# Altium PCB PanelMT.PcbDoc
Units mm, origin at the board's own origin, x right, y up, seen from the top; angles counter-clockwise.
Board outline 152.4 x 101.6 mm, 2 copper layers (Top Layer, Bottom Layer); 25 components, 16 nets, 75 pads, 0 vias.
Unrouted connection lines stored in the file: 8.
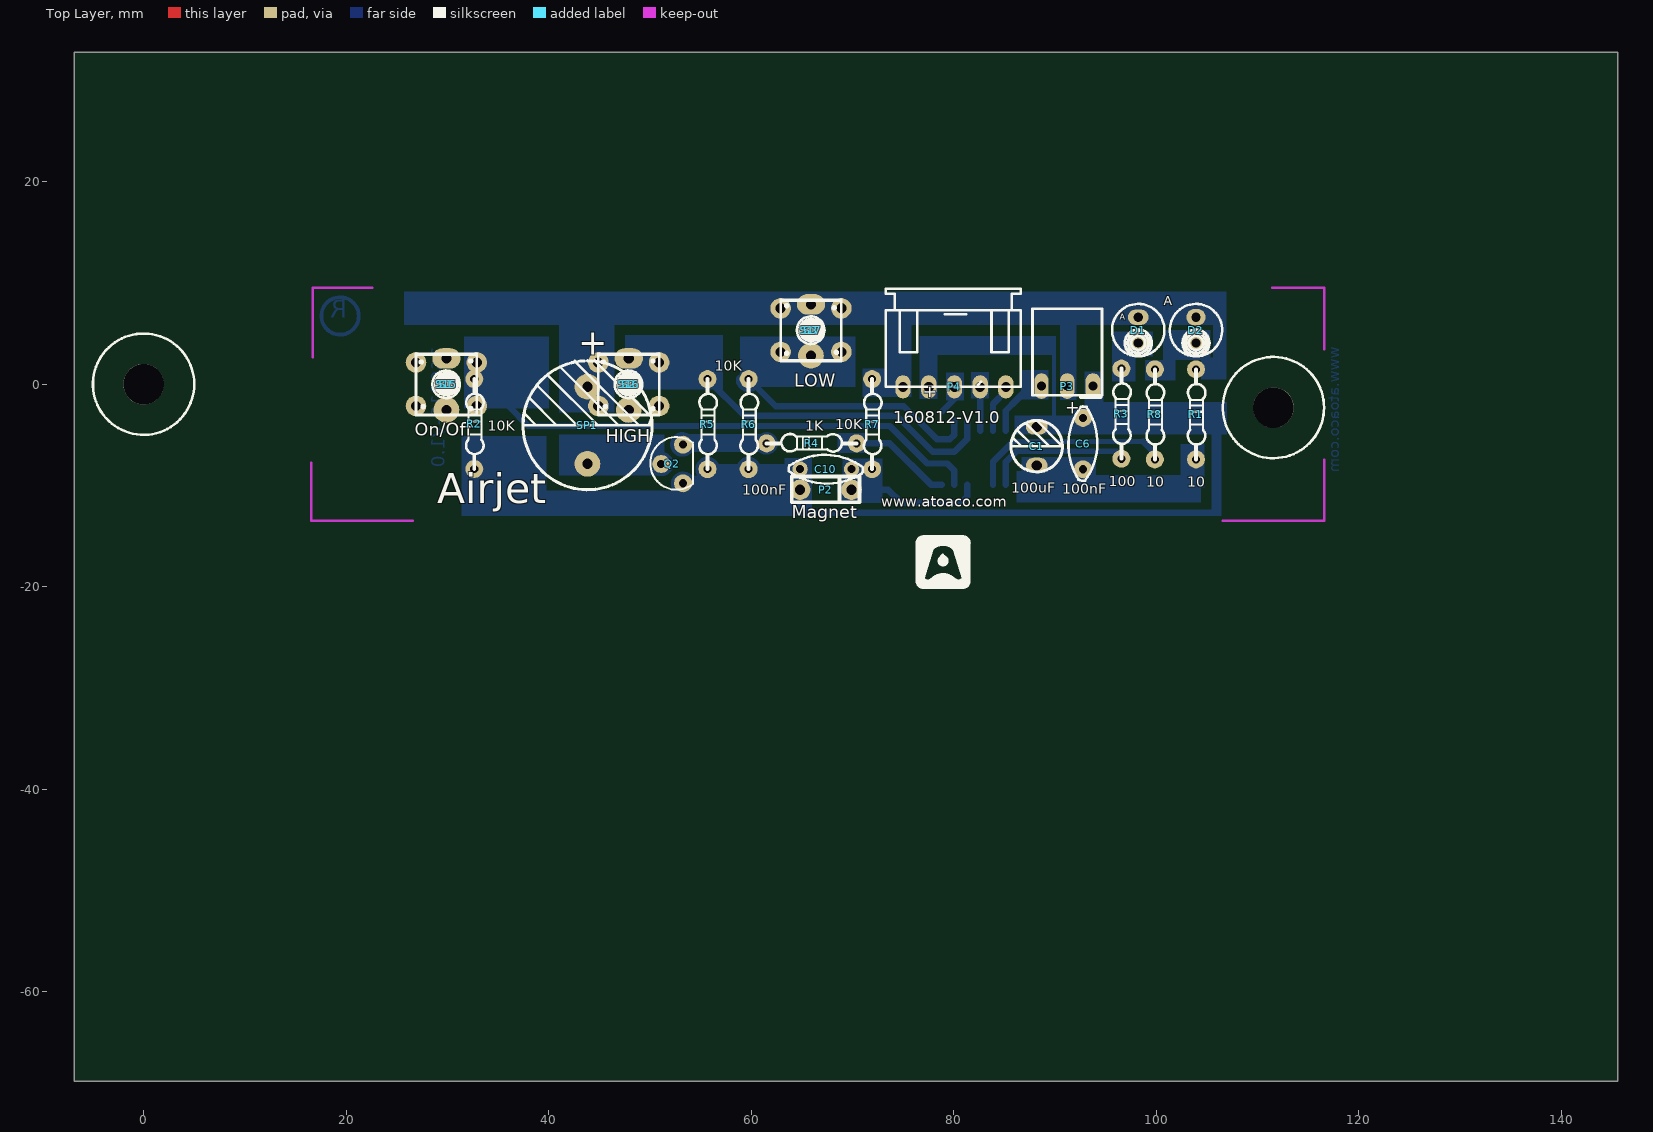
[diagram p0: Top Layer view]
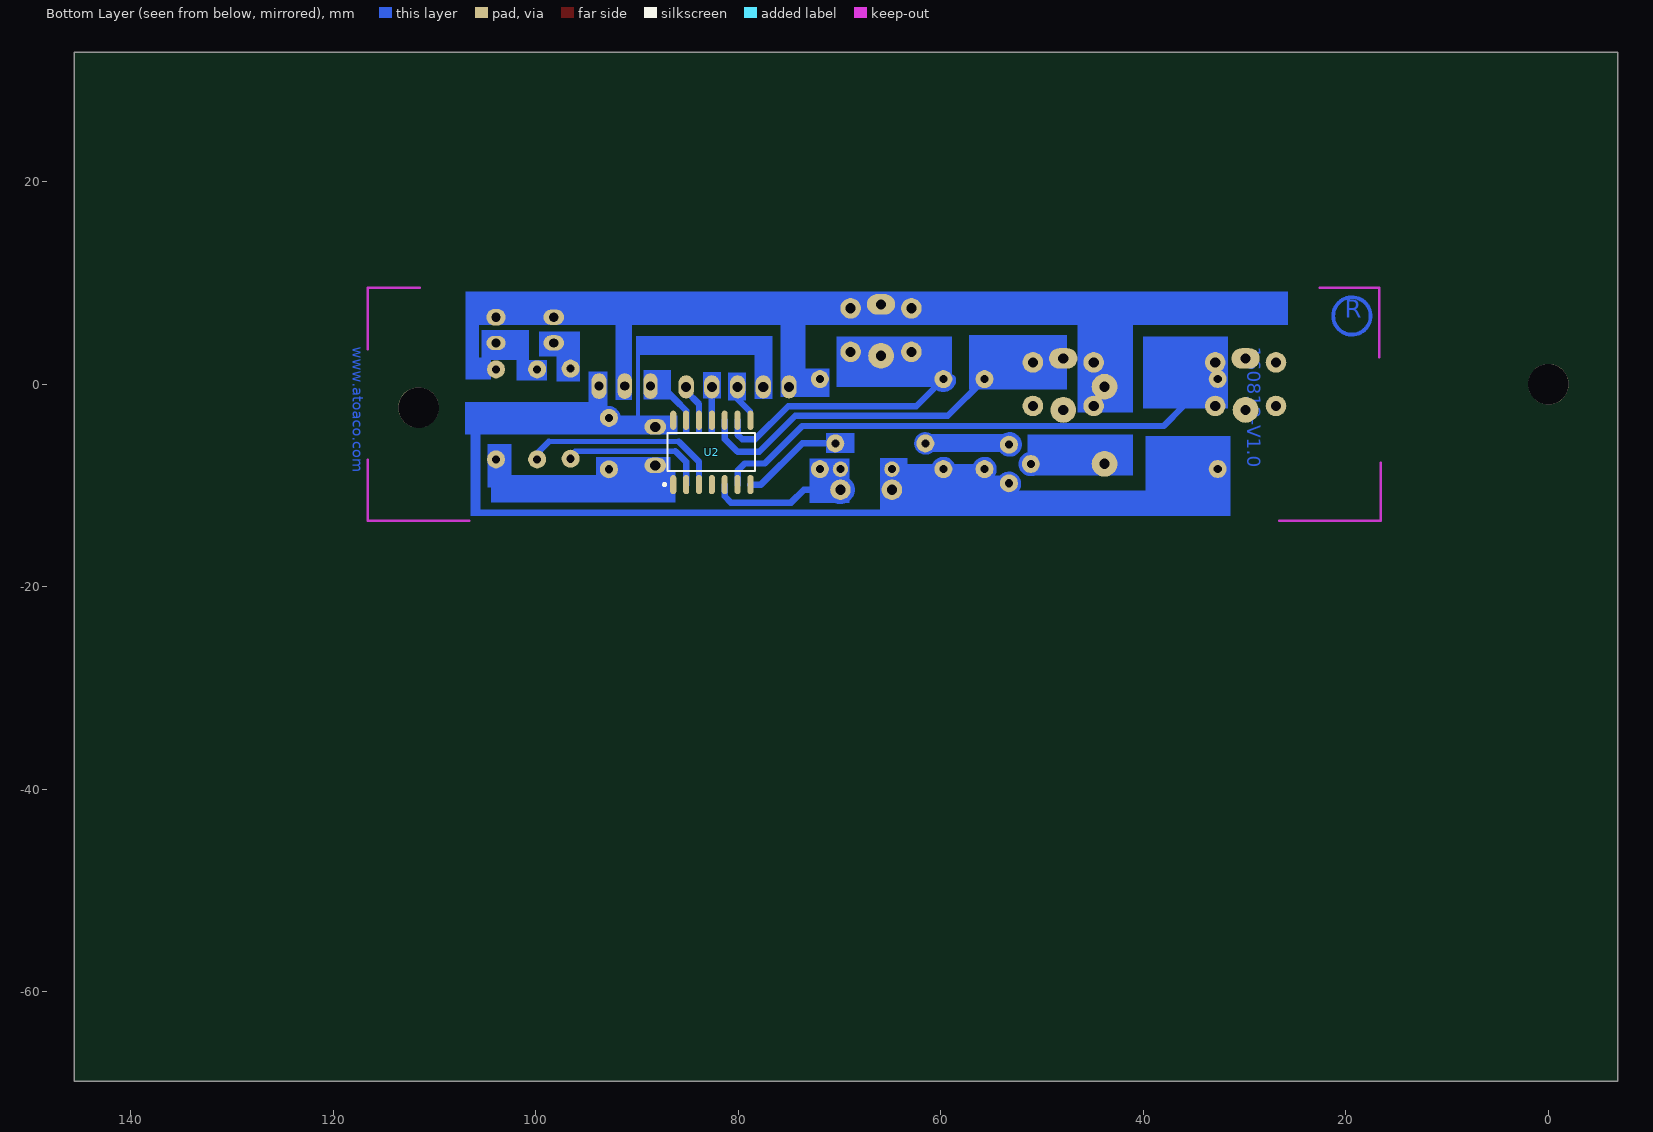
[diagram p1: Bottom Layer view, seen from below]

## Layer stack, top to bottom
Top Layer: signal copper 0.0356
Dielectric: dielectric 0.32, FR-4, Dk 4.8
Bottom Layer: signal copper 0.0356

## Board outline
-6.842,-68.829 145.558,-68.829 145.558,32.771 -6.842,32.771

## Design rules (kind name [scope] priority, off if disabled: settings)
Clearance [All] p1: gap=0.254
PolygonConnect [All] p1: connectstyle=Relief reliefconductorwidth=0.254 reliefentries=4 polygonreliefangle="90 Angle"
RoutingVias [All] p1: holewidth=0.711 width=1.27 viastyle="Through Hole" minholewidth=0.711 minwidth=1.27 maxholewidth=0.711 maxwidth=1.27
SolderMaskExpansion [All] p1: expansion=0.102
TestPointUsage [All] p1: valid=0 allowmultiple=FALSE
Testpoint [All] p1: side=15 testpointundercomponent=TRUE minsize=1.016 maxsize=2.54 preferedsize=1.524 minholesize=0 maxholesize=1.016 preferedholesize=0.813 testpointgrid=0.025 style=1023 order=0-112345678
Width [All] p1: maxlimit=2.54 minlimit=0.254 preferedwidth=0.254 toplayer_prefwidth=0.635 bottomlayer_prefwidth=0.635 minimp=50.000000 maximp=50.000000 favimp=50.000000
19 further rules are at their usual default settings.

## Components (designator, comment, footprint, x,y, rotation, side; value= is the part's Value field where it differs from the comment)
C1 "100uF" RB.15/.2 88.193,-7.388 r90 top
C6 "100nF" RAD0.2#1 92.765,-3.324 r270 top
C10 "100nF" RAD0.2#2 64.825,-8.388 r0 top
D1 "RED" LED0.5#1 98.216,5.342 r270 top
D2 "Green" LED0.5#2 103.916,5.342 r270 top locked (schematic designator Dred)
P2 "Magnet" Magnet 69.905,-10.42 r180 top
P3 "IrReceiver" IrRec1 91.195,5.042 r0 top locked
P4 "Header 5" xH5RA 74.985,-0.26 r270 top
Q2 "2N3904" TO92BS2 52.633,-7.88 r270 top
R1 "10" RES0.35 103.916,-7.423 r90 top locked
R2 "10K" RES0.35 32.655,-8.374 r90 top
R3 "100" RES0.35 96.55,-7.358 r90 top
R4 "1K" RES0.35 70.413,-5.848 r180 top
R5 "10K" RES0.35 55.681,-8.388 r90 top
R6 "10K" RES0.35 59.745,-8.388 r90 top
R7 "10K" RES0.35 71.937,-8.388 r90 top
R8 "10" RES0.35 99.852,-7.423 r90 top (schematic designator R1)
S1 "On/Off" PUSHBOT2 29.9,0 r270 top locked
S2 "HIGH" PUSHBOT2 47.9,0 r270 top locked
S3 "LOW" PUSHBOT2 65.9,5.342 r270 top locked
S15 "100/2W" PUSHBOT4 29.9,0 r180 top locked
S16 "100/2W" PUSHBOT4 47.9,0 r180 top locked
S17 "100/2W" PUSHBOT4 65.9,5.342 r0 top locked
SP1 "BUZZER" RB.3/.6 43.831,-0.246 r90 top
U2 "ATtiny24A-SSU" SOIC14 86.415,-9.912 r90 bottom

## Footprints (in the part's own frame and the unit in brackets; to place one, negate y for a bottom-side part, rotate by r counter-clockwise, add the part's x,y. Pads: shape width x height; smd on the part's side, far side on the other; paste and mask are expansions set on the pad)
IrRec1 [mm] "38KHz Ir Receiver"
  oval 1.397x2.54 hole 0.9: 1(-2.531,-5.231) 2(0.009,-5.231)
  oval 1.524x2.54 hole 0.9: 3(2.549,-5.231)
  silkscreen extent -3.42,-6.32 3.44,2.39
LED0.5#1 [mil] "3 color common anode 0.5mm"
  oval 60x80 hole 35.43: 1(-50,0) 2(50,0)
  silkscreen extent -102,-102 102,102
LED0.5#2 [mil] "3 color common anode 0.5mm"
  oval 65x75 hole 35.43: 1(-50,0)
  oval 55x75 hole 35.43: 2(50,0)
  silkscreen extent -102,-102 102,102
Magnet [mil]
  round 80 hole 39.37: 1(0,0) 2(200,0)
  silkscreen extent -31,-51 232,49
PUSHBOT2 [mm] "NO-2pin"
  oval 2.032x2.794 hole 1: 1(-2.54,0)
  round 2.54 hole 1: 2(2.54,0)
  silkscreen extent -2.92,-3 3.08,3
PUSHBOT4 [mm]
  round 2.032 hole 1: 1(3,-2.15) 2(3,2.15) 3(-3,-2.15) 4(-3,2.15)
  silkscreen extent -3,-3 3,3
RAD0.2#1 [mil]
  round 70 hole 31.5: 1(0,0) 2(200,0)
  silkscreen extent -44,-57 244,55
RAD0.2#2 [mil]
  round 60 hole 31.5: 1(0,0) 2(200,0)
  silkscreen extent -44,-57 244,55
RB.3/.6 [mil]
  round 100 hole 40: 1(0,0) 2(-300,0)
  silkscreen extent -401,-251 102,251
RB.15/.2 [mil]
  oval 60x85 hole 39.37: 1(-25,0) 2(125,0)
  silkscreen extent -50,-100 150,100
RES0.35 [mil] "Diode, Axial; Body 5.2 x 2.7 mm (LxDia. max), Lead Dia. 0.86 mm (max)"
  round 70 hole 31.5: 1(0,0)
  round 70 hole 31.5 paste+0: 2(350,0)
  silkscreen extent 0,-37 350,32
SOIC14 [mm] "SOIC, 16-Leads, Body 9.9x3.9mm, Pitch 1.27mm, IPC High Density"
  oval 1.9x0.6 smd: 1(0,0) 2(0,-1.27) 3(0,-2.54) 4(0,-3.81) 5(0,-5.08) 6(0,-6.35) 7(0,-7.62) 8(6.351,-7.62) 9(6.351,-6.35) 10(6.351,-5.08) 11(6.351,-3.81) 12(6.351,-2.54) 13(6.351,-1.27) 14(6.351,0)
  silkscreen extent -0.12,-8.08 5.08,0.98, body extent 0.4,-8.08 5.97,0.51, height 1.75
TO92BS2 [mil] "NPN-CC5551,C945 Base Side"
  round 70 hole 31.5: 1(-75,25) 2(0,-60) 3(75,25)
  silkscreen extent -105,-102 100,63
xH5RA [mil] "100mil between pins"
  oval 90x60 hole 39.37: 1(0,0) 2(0,100) 3(0,200) 4(0,300) 5(0,400)
  silkscreen extent -382,-67 0,458

## Part data
C1 C10: library part Cap, "Capacitor SMD"
C6: library part "Cap Pol", "Polarized Capacitor (SMD)"
D1 D2: library part LED0.5, "LED Radial 0.5"
P2: library part "Header 6", "Header, 6-Pin"
P3: library part "Header 3", "3pin"
P4: "Header, 5-Pin"
Q2: library part BC337, "NPN General Purpose Amplifier"
R1 R2 R3 R4 R5 R6 R7 R8: library part Resistor, "Resistor"
S1 S2 S3: library part SW-PB, "Push Botton"
U2: library part ATtiny24-16PC, "8-Bit AVR Microcontroller with 2K Bytes of Flash Memory"

## Free pads (board coordinates)
  round 4 hole 4: 2(0,0) 2(111.565,-2.308)

## Nets (pads, with @x,y where several pads share a name; then routed paths per layer and width w, separated by ;. In a path a pad name is that pad's centre, name@x,y a point inside that pad or via, vN(x,y) a via of type N, cw(c..) or ccw(c..) an arc to the next point about the centre after c; other vN are vias at no path point)
+5V: D1.1 D2.1 P3.2 P4.1 R1.2 R7.2 S1.1 S2.1 S3.1 S15.1 S15.3 S16.1 S16.3 S17.2 S17.4 SP1.1
BUZZER: R4.1 U2.7 | length 10.6
  Bottom Layer w0.635: R4.1@69.905,-5.848 73.69,-5.848 77.754,-9.912 U2.7
DIMOUT: P4.3 U2.8 | length 2.5
  Bottom Layer w0.635: U2.8@78.871,-2.673 80.141,-1.403 ; P4.3@80.065,-0.972 P4.3
GND: C1.2 C6.1 C10.1 P2.2 P3.3 P4.2 Q2.3 R2.1 R5.1 R6.1 U2.14 | length 19.7
  Bottom Layer w0.635: 54.157,-9.836 ccw(c53.268,-9.836) 54.157,-9.836
  Bottom Layer w0.889: R5.1@56.447,-8.388 ccw(c55.681,-8.388) R5.1@56.447,-8.388 ; R6.1@60.511,-8.388 ccw(c59.745,-8.388) R6.1@60.511,-8.388 ; C6.1@93.479,-3.324 ccw(c92.765,-3.324) C6.1@93.479,-3.324
IRSEN: P3.1 U2.13 | length 6.5
  Bottom Layer w0.635: 85.145,-4.577 85.145,-2.619 86.252,-1.513 87.575,-0.189 P3.1
KEY1: R2.2 S1.2 S15.2 S15.4 U2.6 | length 48
  Bottom Layer w0.635: 36.047,-2.191 37.983,-4.127 73.67,-4.127 77.373,-7.83 79.354,-7.83 80.065,-8.541 U2.6
KEY2: R5.2 S2.2 S16.2 S16.4 U2.10 | length 31
  Bottom Layer w0.635: R5.2 59.313,-3.131 74.375,-3.131 77.931,-6.687 80.065,-6.687 81.335,-5.417 U2.10
KEY3: R6.2 S3.2 S17.1 S17.3 U2.9 | length 27
  Bottom Layer w0.635: R6.2 62.412,-2.165 75.061,-2.165 78.338,-5.442 79.608,-5.442 80.065,-4.985 U2.9
  Bottom Layer w0.889: R6.2@58.918,0.502 ccw(c59.745,0.502) R6.2@60.572,0.502
LED: R3.1 U2.2 | length 13.7
  Bottom Layer w0.508: 86.198,-6.624 R3.1@96.127,-6.624
  Bottom Layer w0.635: U2.2 85.145,-7.677 86.198,-6.624
MAGNET: C10.2 P2.1 R7.1 U2.5 | length 19.5
  Bottom Layer w0.635: P2.1 73.512,-10.42 74.782,-11.69 80.725,-11.69 81.335,-11.081 U2.5
  Bottom Layer w0.889: P2.1@70.879,-10.42 ccw(c69.905,-10.42) P2.1@70.879,-10.42
NetD1_2: D1.2 R3.2
NetQ2_1: Q2.1 R4.2 | length 9.8
  Bottom Layer w0.635: Q2.1@54.106,-5.95 ccw(c53.208,-5.95) Q2.1@54.106,-5.95
  Bottom Layer w0.889: R4.2@62.183,-5.848 ccw(c61.523,-5.848) R4.2@62.183,-5.848
NetQ2_2: Q2.2 SP1.2 | length 5.6
  Bottom Layer w0.635: 51.998,-7.88 ccw(c51.109,-7.88) 51.998,-7.88
RELAY1: P4.4 U2.11 | length 4.7
  Bottom Layer w0.635: P4.4@82.351,-0.514 P4.4 82.605,-4.577
VMIC: C1.1 C6.2 R1.1 U2.1
ZEROC: P4.5 U2.12 | length 4.8
  Bottom Layer w0.635: 83.875,-4.577 83.875,-1.962 85.145,-0.692 P4.5
pads on no net: D2.2 R8.1 R8.2 U2.3 U2.4
copper on no net: | length 31.8
  Bottom Layer w0.381: 21.25,6.739 ccw(c19.401,6.739) 21.25,6.739
  Bottom Layer w0.508: 85.856,-5.671 98.709,-5.671
  Bottom Layer w0.635: 83.875,-9.912 83.875,-7.652 85.856,-5.671 ; 98.709,-5.671 99.852,-6.814 99.852,-7.423

## Keep-outs
Keep-Out Layer:
  lines w0.254: 16.565,-7.753 16.565,-13.468 26.565,-13.468 ; 16.692,2.645 16.692,9.532 22.559,9.532 ; 106.565,-13.468 116.565,-13.468 116.565,-7.468 ; 111.459,9.532 116.565,9.532 116.565,3.448

## Other copper
Bottom Layer:
  rectangle net NetQ2_1: 53.522,-6.687 62.031,-4.909
  rectangle net GND: 31.41,-13.011 106.456,-12.376
  rectangle net GND: 105.44,-12.503 106.456,-3.625
  rectangle net GND: 93.361,-4.985 106.964,-1.77
  rectangle net NetQ2_2: 46.879,-9.023 51.439,-4.945
  rectangle net NetQ2_2: 41.037,-9.023 46.879,-4.945
  rectangle net GND: 53.954,-10.954 55.935,-9.023
  rectangle net GND: 31.41,-10.522 39.767,-5.112
  rectangle net GND: 31.41,-12.402 57.434,-10.522
  rectangle net GND: 55.402,-12.833 66.019,-7.88
  rectangle net GND: 89.717,-3.502 90.098,4.769
  rectangle net GND: 76.636,2.889 90.098,4.743
  rectangle net GND: 76.636,-1.454 78.414,3.981
  rectangle net MAGNET: 69.016,-11.741 72.978,-7.347
  rectangle net KEY1: 31.639,-2.405 40.021,4.707
  rectangle net KEY2: 47.514,-0.5 57.205,4.834
  rectangle net KEY3: 58.881,-0.286 70.311,4.707
  rectangle net +5V: 41.037,-2.786 46.498,5.85
  rectangle net +5V: 73.346,-1.276 75.823,6.434
  rectangle net IRSEN: 86.644,-1.516 89.336,1.405
  rectangle net NetD1_2: 95.647,0.262 97.933,3.056
  rectangle net NetD1_2: 95.647,2.737 99.674,5.215
  rectangle net VMIC: 102.392,-10.206 104.767,-5.899
  rectangle net VMIC: 94.06,-11.665 104.424,-8.947
  rectangle net VMIC: 86.669,-8.582 94.06,-7.211
  rectangle net VMIC: 86.186,-11.665 94.06,-8.582
  rectangle net GND: 85.995,-4.985 93.361,-3.07
  rectangle net GND: 92.892,-4.442 94.797,1.248
  rectangle net +5V: 90.479,-1.546 92.13,6.201
  rectangle net +5V: 104.398,0.476 106.684,2.635
  rectangle net +5V: 105.617,0.476 106.913,5.85
  rectangle net +5V: 25.709,5.85 106.913,9.152
  rectangle net +5V: 70.997,-1.276 73.346,1.543
  rectangle net DIMOUT: 79.227,-1.607 81.005,1.137
  rectangle net RELAY1: 81.691,-1.429 83.494,1.213
  rectangle net BUZZER: 68.533,-6.788 71.353,-4.832
  rectangle net GND: 63.301,-7.88 66.019,-7.271
  rectangle: 98.886,0.349 101.909,2.381
  rectangle net +5V: 100.664,2.381 105.338,5.328
  text "R" at 20.107,5.977 h3.05
  text "160812-V1.0" at 30.205,3.702 h2.29 r90
  text "www.atoaco.com" at 118.419,3.702 h1.78 r90

## Silkscreen, mask and mechanical layers (free items; w line width, h text height)
Top Overlay:
  circle w0.254: c111.565,-2.308 r5
  circle w0.254: c0,0 r5
  region: 76.849,-15.032 80.913,-15.032 81.294,-15.159 81.421,-15.54 81.421,-19.35 81.548,-19.477 81.421,-19.858 81.04,-19.985 77.103,-19.985 76.976,-20.112 76.595,-19.858 76.341,-19.477 76.341,-18.842 76.722,-18.969 77.191,-18.583 77.315,-18.165 77.865,-16.302 78.373,-15.921 79.389,-15.794 79.897,-16.302 80.024,-16.302 80.024,-16.495 80.275,-16.746 80.275,-17.38 80.487,-17.592 80.487,-18.18 80.733,-18.426 80.733,-18.881 80.913,-19.061 80.913,-19.223 80.786,-19.223 80.532,-19.477 80.151,-19.477 79.516,-18.842 78.246,-18.842 77.738,-19.35 77.103,-19.35 76.976,-19.223 77.191,-18.582 76.722,-18.969 76.341,-18.842 76.341,-15.667
  region: 79.042,-16.983 79.262,-17.204 79.262,-17.572 79.008,-17.826 78.754,-17.826 78.627,-17.699 78.627,-17.205 78.615,-17.193
  lines w0.254: 76.341,-15.794 76.341,-19.35 ccw(c77.04,-19.413) 76.976,-20.112 80.786,-20.112 ccw(c80.85,-19.413) 81.548,-19.477 81.548,-15.794 ccw(c80.85,-15.73) 80.913,-15.032 77.103,-15.032 ccw(c77.04,-15.73) 76.341,-15.667 ; 76.976,-19.223 ccw(c77.421,-18.778) 77.865,-19.223 cw(c78.945,-20.302) 80.024,-19.223 ccw(c80.469,-18.778) 80.913,-19.223 80.041,-16.364 ; 77.002,-19.223 77.865,-16.302 cw(c78.945,-17.381) 80.024,-16.302 ; 78.615,-17.193 ccw(c78.947,-17.45) 79.275,-17.187 78.904,-16.863 78.615,-17.193
  text "+" at 42.942,2.929 h2.54
  text "+" at 76.724,-0.119 h2.03 r270
  text "+" at 90.987,-2.943 h1.27
  text "160812-V1.0" at 74.02,-4.274 h2.03
  text "www.atoaco.com" at 72.851,-12.427 h1.78
  text "Airjet" at 28.986,-12.757 h5.08
  text "Magnet" at 63.987,-13.214 h1.27

## Text inside footprints (layer, text, board x,y; h text height)
D1: Top Overlay "A" at 96.4,6.166 h1
D2: Top Overlay "A" at 100.745,7.487 h1.52